# EAGLE board Domuino (EAGLE 7.6.0)

Size 53 x 68 mm. Coordinates in mm from the lower left corner, seen from the top.
Outline: 0,0 53,0 53,68 0,68 0,0
Copper layers (1*16): Top 0.035mm / dielectric 1.5mm / Bottom 0.035mm
Design rules "default": minimum track width 10mil, minimum drill 24mil, track to track 8mil, track to pad 8mil, pad to pad 8mil, via to via 8mil, smd to smd 8mil, copper to edge 40mil, drill to drill 8mil, minimum pad ring 10mil, minimum via ring 8mil, stop-mask expansion 4mil, vias tented up to drill 0mil, thermal gap 10mil

## Footprints (pad centres in the part's own frame; a part is rotated, then mirrored left to right if it is on the bottom)
CAP-PTH-SMALL-KIT = drill 1.016 pad 2.032: 1 -1.397,0; 2 1.397,0
1X08_ROUND = drill 1.016 pad 1.88: 1 0,0; 2 2.54,0; 3 5.08,0; 4 7.62,0; 5 10.16,0; 6 12.7,0; 7 15.24,0; 8 17.78,0
1X10 = drill 1.016 pad 1.88: 1 0,0; 2 2.54,0; 3 5.08,0; 4 7.62,0; 5 10.16,0; 6 12.7,0; 7 15.24,0; 8 17.78,0; 9 20.32,0; 10 22.86,0
1X06 = drill 1.016 pad 1.88: 1 0,0; 2 2.54,0; 3 5.08,0; 4 7.62,0; 5 10.16,0; 6 12.7,0
JUMPER2 = drill 1.016 pad 1.88 square: P$1 -1.27,0 | drill 1.016 pad 1.88: P$2 1.27,0
MOLEX-1X4 = drill 1.016 pad 1.88 square: 1 0,0 | drill 1.016 pad 1.88: 2 2.54,0; 3 5.08,0; 4 7.62,0
1X05 = drill 1.016 pad 1.88: 1 0,0; 2 2.54,0; 3 5.08,0; 4 7.62,0; 5 10.16,0
1X16 = drill 1.016 pad 1.88: 1 0,0; 2 2.54,0; 3 5.08,0; 4 7.62,0; 5 10.16,0; 6 12.7,0; 7 15.24,0; 8 17.78,0; 9 20.32,0; 10 22.86,0; 11 25.4,0; 12 27.94,0; 13 30.48,0; 14 33.02,0; 15 35.56,0; 16 38.1,0
AXIAL-0.3 = drill 0.9 pad 1.88: P$1 -3.81,0; P$2 3.81,0
SPDIP-28PIN = drill 0.8: P$1 -5.08,17.78; P$2 -5.08,15.24; P$3 -5.08,12.7; P$4 -5.08,10.16; P$5 -5.08,7.62; P$6 -5.08,5.08; P$7 -5.08,2.54; P$8 -5.08,0; P$9 -5.08,-2.54; P$10 -5.08,-5.08; P$11 -5.08,-7.62; P$12 -5.08,-10.16; P$13 -5.08,-12.7; P$14 -5.08,-15.24; P$15 5.08,-15.24; P$16 5.08,-12.7; P$17 5.08,-10.16; P$18 5.08,-7.62; P$19 5.08,-5.08; P$20 5.08,-2.54; P$21 5.08,0; P$22 5.08,2.54; P$23 5.08,5.08; P$24 5.08,7.62; P$25 5.08,10.16; P$26 5.08,12.7; P$27 5.08,15.24; P$28 5.08,17.78
TO220 = drill 1.016 pad 1.88: P$1 -2.54,0; P$2 0,0; P$3 2.54,0
RPDIP-8PIN = drill 0.8: P$1 -3.81,3.81; P$2 -3.81,1.27; P$3 -3.81,-1.27; P$4 -3.81,-3.81; P$5 3.81,-3.81; P$6 3.81,-1.27; P$7 3.81,1.27; P$8 3.81,3.81

## Placement (x,y rotation side)
C1  100n 50V  [CAP-PTH-SMALL-KIT]  35.56,38.1 90 top
C2  470u 35V  [CAP-PTH-SMALL-KIT]  39.37,38.1 90 top
C3  100n 50V  [CAP-PTH-SMALL-KIT]  43.18,38.1 90 top
C4  470u 16V  [CAP-PTH-SMALL-KIT]  43.18,31.75 90 top
C5  100n 50V  [CAP-PTH-SMALL-KIT]  39.37,31.75 90 top
C6  100n 50V  [CAP-PTH-SMALL-KIT]  35.56,31.75 90 top
C7  10u Tantalium  [CAP-PTH-SMALL-KIT]  31.75,31.75 90 top
C8  100n 50V  [CAP-PTH-SMALL-KIT]  31.75,38.1 90 top
C9  100n 50V  [CAP-PTH-SMALL-KIT]  39.37,44.45 90 top
C10  470u 16V  [CAP-PTH-SMALL-KIT]  35.56,44.45 90 top
C11  10u  [CAP-PTH-SMALL-KIT]  31.75,44.45 90 top
J1  POWER - IN  [1X08_ROUND]  2.54,31.75 90 top
J2  DIGITAL_L - IN  [1X08_ROUND]  50.8,17.78 90 top
J3  DIGITAL_H - OUT  [1X10]  46.99,39.37 90 top
J4  ANALOG - IN  [1X06]  2.54,15.24 90 top
J5  JUMPER2  [JUMPER2]  36.83,52.07 90 top
J6  JUMPER2  [JUMPER2]  31.75,52.07 90 top
J7  BUS  [MOLEX-1X4]  33.02,64.77 0 top
J8  PGM  [1X06]  13.97,55.88 0 top
J9  DIGITAL_L - OUT  [1X08_ROUND]  46.99,17.78 90 top
J10  JUMPER2  [JUMPER2]  34.29,52.07 90 top
J11  DIGITAL_H - IN  [1X10]  50.8,39.37 90 top
J12  POWER - OUT  [1X08_ROUND]  6.35,31.75 90 top
J13  ANALOG - OUT  [1X06]  6.35,15.24 90 top
J14  GPIO1  [1X05]  15.24,6.35 0 top
J15  GPIO2  [1X16]  2.54,2.54 0 top
R1  100K  [AXIAL-0.3]  35.56,7.62 0 top
R2  33K  [AXIAL-0.3]  45.72,11.43 180 top
R3  330  [AXIAL-0.3]  45.72,7.62 180 top
R4  120  [AXIAL-0.3]  38.1,60.96 0 top
R9  1k  [AXIAL-0.3]  35.56,11.43 0 top
U1  [SPDIP-28PIN]  20.32,33.02 0 top
U2  LM317_TO220  [TO220]  8.89,62.23 0 top
U3  MCP2562_RDIP-8PIN  [RPDIP-8PIN]  35.56,20.32 0 top
U4  LM7805T_TO220  [TO220]  20.32,62.23 0 top

## Library data of the parts
C1-C11 = SparkFun-Capacitors; PROD_ID: CAP-08370
J1 J12 = SparkFun-Connectors; PROD_ID: POWER
J2 J4 J8 J9 J13 = SparkFun-Connectors; PROD_ID: CONN-08437
J3 J11 = SparkFun-Connectors; PROD_ID: CONN-11563
J5 J6 J10 U1-U4 = Luca
J7 J14 J15 = SparkFun-Connectors
R1-R4 R9 = SparkFun-Resistors; PROD_ID: RES-12184

## Nets
+3V3: C3.1 C4.1 C5.1 C6.1 C8.1 J8.1 R1.P$2 R9.P$2 U1.P$13 U1.P$28 U2.P$2 U3.P$5
+5V: C1.1 C9.1 C10.1 U2.P$3 U3.P$3 U4.P$3
+12V: C2.1 J5.P$1 J10.P$2 U4.P$1
GND: C1.2 C2.2 C3.2 C4.2 C5.2 C6.2 C7.2 C8.2 C9.2 C10.2 C11.2 J1.6 J1.7 J7.4 J8.5 J12.6 J12.7 R2.P$1 U1.P$8 U1.P$19 U1.P$27 U3.P$2 U4.P$2
N$1: J1.8 J10.P$1 J12.8
N$2: R1.P$1 R2.P$2 U2.P$1
N$3: J4.4 J13.4
N$4: C11.1 J6.P$1
N$5: J4.5 J13.5
N$6: J4.6 J13.6
N$7: R3.P$2 U1.P$1
N$8: J8.3 J15.3 U1.P$6
N$9: J8.4 J15.4 U1.P$7
N$10: J7.2 R4.P$1 U3.P$7
N$11: J7.3 R4.P$2 U3.P$6
N$12: J15.8 U1.P$16 U3.P$1
N$13: J15.7 U1.P$15 U3.P$4
N$14: J3.1 J11.1
N$15: J15.11 U1.P$21 U3.P$8
N$16: J6.P$2 J8.2 R3.P$1 R9.P$1
N$17: J3.2 J11.2
N$18: J3.3 J11.3
N$19: J3.4 J11.4
N$20: J3.5 J11.5
N$21: J3.6 J11.6
N$22: J3.7 J11.7
N$23: J3.8 J11.8
N$24: J3.9 J11.9
N$25: J3.10 J11.10
N$26: J2.1 J9.1 J15.5 U1.P$11
N$27: C7.1 U1.P$20
N$28: J15.14 U1.P$24
N$29: J2.3 J9.3
N$30: J2.4 J9.4
N$31: J2.5 J9.5
N$32: J2.6 J9.6
N$33: J2.7 J9.7
N$34: J2.8 J9.8
N$35: J1.1 J12.1
N$36: J1.2 J12.2
N$37: J1.3 J12.3
N$38: J1.4 J12.4
N$39: J1.5 J12.5
N$40: J4.1 J13.1
N$41: J4.2 J13.2
N$42: J4.3 J13.3
N$43: J14.5 U1.P$12
N$44: J14.4 U1.P$10
N$45: J14.3 U1.P$9
N$46: J14.2 U1.P$3
N$47: J14.1 U1.P$2
N$48: J15.1 U1.P$4
N$49: J15.2 U1.P$5
N$50: J15.6 U1.P$14
N$51: J15.12 U1.P$22
N$52: J15.9 U1.P$17
N$53: J15.10 U1.P$18
N$54: J2.2 J9.2 J15.13 U1.P$23
N$55: J15.15 U1.P$25
N$56: J15.16 U1.P$26
V+: J5.P$2 J7.1

## Tracks (layer width: path | path; a pad name or v marks a point on that pad's centre or on a via)
+3V3  (11 unrouted)
+5V  (5 unrouted)
+12V  (3 unrouted)
GND  (22 unrouted)
N$1  (2 unrouted)
N$2  (2 unrouted)
N$3  (1 unrouted)
N$4  (1 unrouted)
N$5  (1 unrouted)
N$6  (1 unrouted)
N$7  (1 unrouted)
N$8  (2 unrouted)
N$9  (2 unrouted)
N$10  (2 unrouted)
N$11  (2 unrouted)
N$12  (2 unrouted)
N$13  (2 unrouted)
N$14  (1 unrouted)
N$15  (2 unrouted)
N$16  (3 unrouted)
N$17  (1 unrouted)
N$18  (1 unrouted)
N$19  (1 unrouted)
N$20  (1 unrouted)
N$21  (1 unrouted)
N$22  (1 unrouted)
N$23  (1 unrouted)
N$24  (1 unrouted)
N$25  (1 unrouted)
N$26  (3 unrouted)
N$27  (1 unrouted)
N$28  (1 unrouted)
N$29  (1 unrouted)
N$30  (1 unrouted)
N$31  (1 unrouted)
N$32  (1 unrouted)
N$33  (1 unrouted)
N$34  (1 unrouted)
N$35  (1 unrouted)
N$36  (1 unrouted)
N$37  (1 unrouted)
N$38  (1 unrouted)
N$39  (1 unrouted)
N$40  (1 unrouted)
N$41  (1 unrouted)
N$42  (1 unrouted)
N$43  (1 unrouted)
N$44  (1 unrouted)
N$45  (1 unrouted)
N$46  (1 unrouted)
N$47  (1 unrouted)
N$48  (1 unrouted)
N$49  (1 unrouted)
N$50  (1 unrouted)
N$51  (1 unrouted)
N$52  (1 unrouted)
N$53  (1 unrouted)
N$54  (3 unrouted)
N$55  (1 unrouted)
N$56  (1 unrouted)
V+  (1 unrouted)